# Allegro board BBear_balance_carv2_0.brd
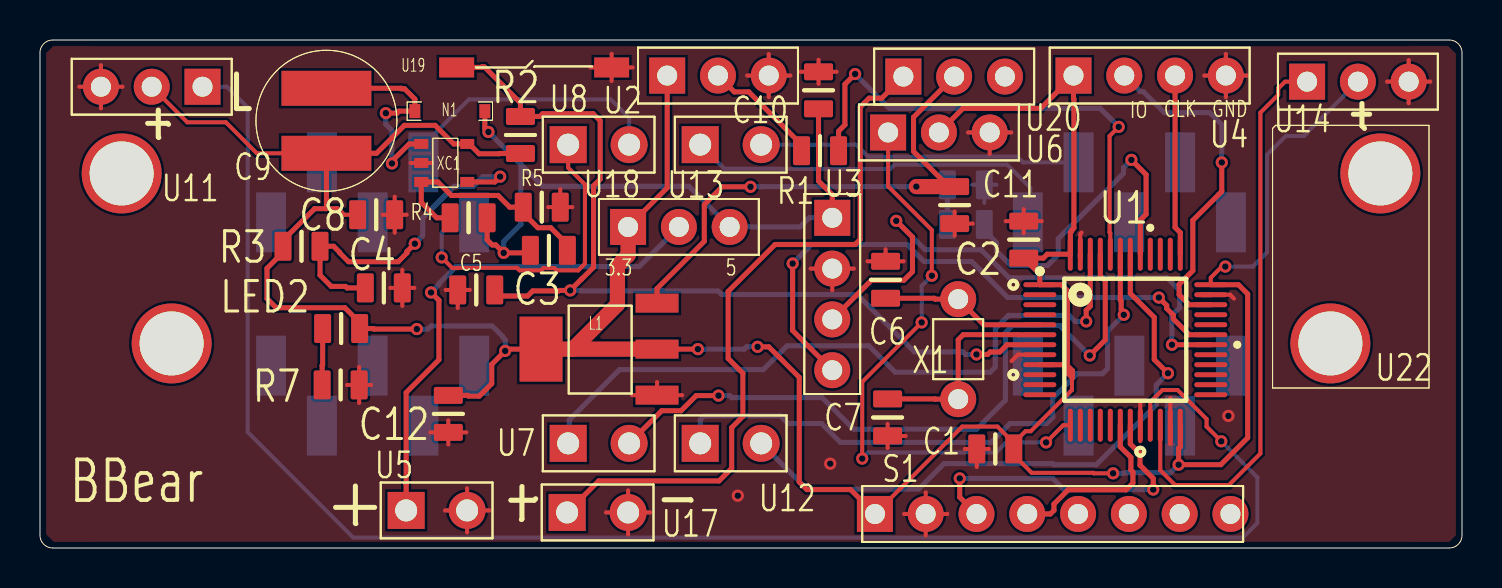
[diagram p0: board, top side]
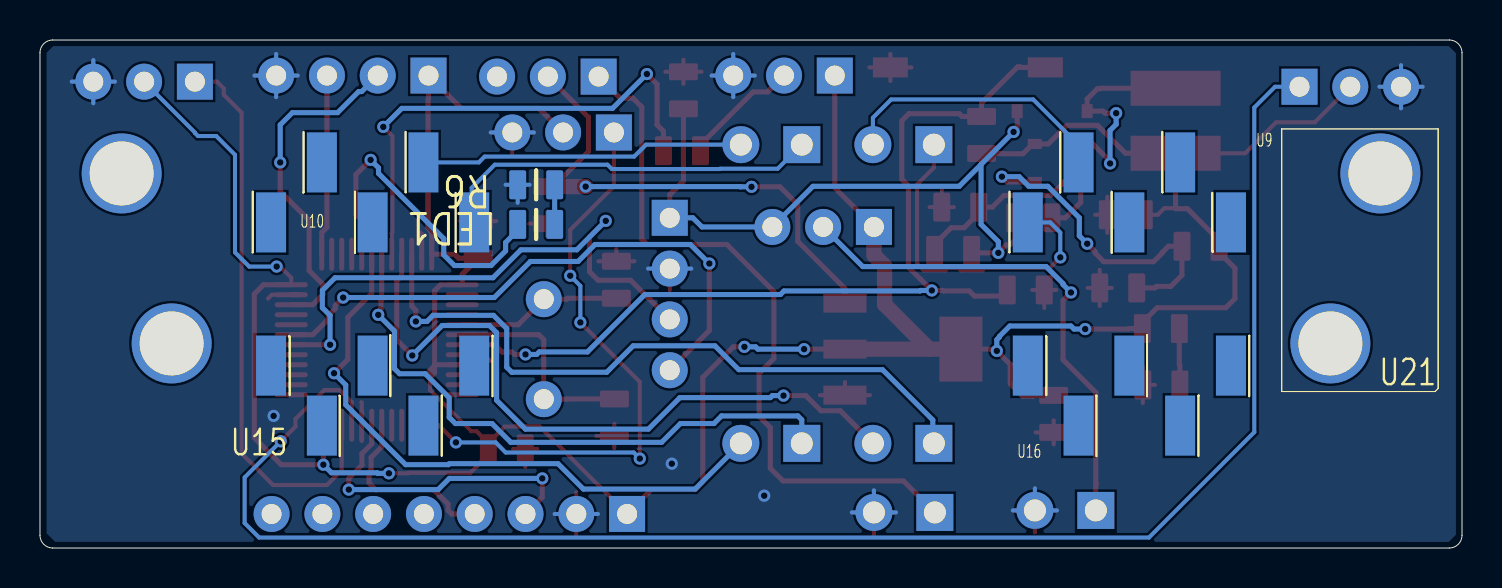
[diagram p1: board, bottom side, seen from below]

Outline 71.12 x 25.4 mm; copper layers: TOP, BOTTOM. Coordinates in mm from the lower left corner of the outline.
Outline path: 0,24.77 arc(0.19,25.21) 0.64,25.4 70.48,25.4 arc(70.93,25.21) 71.12,24.77 71.12,0.63 arc(70.93,0.19) 70.48,0 0.64,0 arc(0.19,0.19) 0,0.63 0,24.77

## Placement (name value [footprint] x y rotation side)
C1  0.1UF  [C-0805]  47.78 4.95 0 top
C2  0.1UF  [C-0805]  49.2 15.42 270 top
C3  CFB1000pF  [C-0805]  25.45 14.88 0 top
C4  CSS0.1uF  [C-0805]  17.2 13 0 top
C5  1UF  [C-0805]  21.82 12.9 0 top
C6  22PF  [C-0805]  42.29 13.41 270 top
C7  22PF  [C-0805]  42.39 6.53 90 top
C8  CIN4.7uF  [C-0805]  16.81 16.66 0 top
C9  L_4.7uH  [CD43]  14.33 21.36 180 top
C10  CL4.7uF  [C-0805]  38.94 22.89 90 top
C11  0.1UF  [C-0805]  45.75 17.14 270 top
C12  10UF  [C-0805]  20.42 6.71 90 top
L1  LM1117  [LM1117_3_3]  30.86 12.24 180 top
LED1  HEARTLED  [C-0805]  46.3 16.18 0 bottom
LED2  POWER  [C-0805]  15.06 10.97 0 top
N1  SD_XBS104S14R  [SOD-123]  20.5 21.84 0 top
R1  10K  [C-0805]  39.01 19.86 0 top
R2  10K  [C-0805]  24.03 20.65 90 top
R3  RSS220K  [C-0805]  13.08 15.09 0 top
R4  RFB1_300K  [C-0805]  21.44 16.51 0 top
R5  RFB2_75K  [C-0805]  25.1 17.04 180 top
R6  1K  [C-0805]  46.3 18.16 0 bottom
R7  1K  [C-0805]  15.04 8.15 0 top
S1  MPU6050  [CON8]  41.76 1.7 90 top
U1  STM32F103C8T6  [NCU100_LQFP_48]  54.28 10.41 0 top
U2  BOOT0  [CON3]  31.37 23.62 90 top
U3  -  [CON4]  39.62 16.51 0 top
U4  SWD  [CON4]  51.69 23.62 90 top
U5  CON2  [CON2_R2_54]  18.31 1.88 90 top
U6  KEY  [CON3]  42.42 20.78 90 top
U7  CON2  [CON2_R2_54]  26.42 5.23 90 top
U8  MOTOR-A  [CON2_R2_54]  26.42 20.17 90 top
U9  CON5  [TP2_54_5]  16.64 17.78 270 bottom
U10  CON5  [TP2_54_5]  54.48 17.78 270 bottom
U11  KEY  [CON3]  8.13 23.06 270 top
U12  CON2  [CON2_R2_54]  33.02 5.23 90 top
U13  MOTOR-B  [CON2_R2_54]  33.02 20.17 90 top
U14  KEY  [CON3]  63.37 23.32 90 top
U15  CON5  [TP2_54_5]  54.48 7.62 90 bottom
U16  CON5  [TP2_54_5]  16.64 7.62 90 bottom
U17  CON2  [CON2_R2_54]  26.37 1.78 90 top
U18  switch  [CON3]  29.41 16.05 90 top
U19  CON2  [3_6KEY]  24.71 24.03 0 top
U20  KEY  [CON3]  43.18 23.57 90 top
U21  CON2  [P4_003_20]  5.33 14.48 0 bottom
U22  CON2  [P4_003_20]  65.79 14.48 0 top
X1  -  [XTAL]  45.92 7.44 90 top
XC1  -  [XC9119]  20.22 19.25 270 top

## Library data of the parts
C1 C2 C5-C7 C11 C12 = CAP: Tolerance: RichardLC; User Part Number: pn
C3 C4 C8 C10 = CAP NP: Tolerance: RichardLC; User Part Number: pn
C9 = CDRH104R_330uH
L1 = LM1117
LED1 LED2 = LED: Tolerance: RichardLC; User Part Number: pn
N1 = 1N5819
R1-R7 = R: Tolerance: RichardLC; User Part Number: pn
S1 = CON8
U1 = STM32F103C8T6: User Part Number: pn; Tolerance: RichardLC
U2 U6 U11 U14 U18 U20 = CON3
U3 U4 = CON4
U5 U7 U8 U12 U13 U17 U19 U21 U22 = CON2
U9 U10 U15 U16 = CON5
X1 = XTAL
XC1 = XC9119

## Footprints (pads in the part's own frame, mm; a bottom-side part is the same pattern mirrored in y, then rotated)
3_6KEY
  rect 1.75x1 smd: 1(-3.875,0) 2(3.875,0)
C-0805
  custom 0.848x1.448 smd: 1(-0.925,0) 2(0.925,0)
CD43
  rect 4.5x1.75 smd: 1(0,1.625) 2(0,-1.625)
CON2_R2_54
  rect 1.849x1.849 hole 1.1: 1(0,0)
  round 1.849 hole 1.1: 2(0,-3.048)
CON3
  rect 1.8x1.8 hole 1: 1(0,0)
  round 1.8 hole 1: 2(0,-2.54) 3(0,-5.08)
CON4
  rect 1.8x1.8 hole 1: 1(0,0)
  round 1.8 hole 1: 2(0,-2.54) 3(0,-5.08) 4(0,-7.62)
CON8
  rect 1.8x1.8 hole 1: 1(0,0)
  round 1.8 hole 1: 2(0,-2.54) 3(0,-5.08) 4(0,-7.62) 5(0,-10.16) 6(0,-12.7) 7(0,-15.24) 8(0,-17.78)
LM1117_3_3
  rect 2.15x0.95 smd: 1(0,0) 2(0,2.3) 3(0,4.6)
  rect 2.15x3.25 smd: 4(5.8,2.3)
NCU100_LQFP_48
  oval 1.651x0.249 smd: 1(-4.275,2.75) 2(-4.275,2.25) 3(-4.275,1.75) 4(-4.275,1.25) 5(-4.275,0.75) 6(-4.275,0.25) 7(-4.275,-0.25) 8(-4.275,-0.75) 9(-4.275,-1.25) 10(-4.275,-1.75) 11(-4.275,-2.25) 12(-4.275,-2.75) 25(4.275,-2.75) 26(4.275,-2.25) 27(4.275,-1.75) 28(4.275,-1.25) 29(4.275,-0.75) 30(4.275,-0.25) 31(4.275,0.25) 32(4.275,0.75) 33(4.275,1.25) 34(4.275,1.75) 35(4.275,2.25) 36(4.275,2.75)
  oval 0.249x1.651 smd: 13(-2.75,-4.275) 14(-2.25,-4.275) 15(-1.75,-4.275) 16(-1.25,-4.275) 17(-0.75,-4.275) 18(-0.25,-4.275) 19(0.25,-4.275) 20(0.75,-4.275) 21(1.25,-4.275) 22(1.75,-4.275) 23(2.25,-4.275) 24(2.75,-4.275) 37(2.75,4.275) 38(2.25,4.275) 39(1.75,4.275) 40(1.25,4.275) 41(0.75,4.275) 42(0.25,4.275) 43(-0.25,4.275) 44(-0.75,4.275) 45(-1.25,4.275) 46(-1.75,4.275) 47(-2.25,4.275) 48(-2.75,4.275)
P4_003_20
  round 4 hole 3.2: 1(-1.25,-4.25) 2(1.25,4.25)
SOD-123
  rect 0.55x0.7 smd: 1(-1.75,0) 2(1.75,0)
TP2_54_5
  rect 3x1.5 smd: 1(1.5,5.08) 2(1.5,0) 3(1.5,-5.08) 4(-1.5,2.54) 5(-1.5,-2.54)
XC9119
  rect 0.5x0.7 smd: 1(-0.95,-1.15) 2(0,-1.15) 3(0.95,-1.15) 4(0.95,1.15) 5(-0.95,1.15)
XTAL
  round 1.8 hole 1: 1(0,0) 2(5,0)

## Nets
GND: C1.1 C2.1 C4.2 C5.1 C6.1 C7.1 C8.2 C10.2 C11.2 C12.1 L1.3(GND) R5.1 R6.2 R7.2 S1.2 U1.8(VSSA) U1.20(PB2/BOOT1) U1.23(VSS_1) U1.35(VSS_2) U1.47(VSS_3) U2.3 U3.2 U4.4 U5.2 U6.3 U11.3 U14.3 U17.2 U19.2 XC1.2(VSS)
VCC3.3: C1.2 C2.2 C8.1 C9.1 C12.2 L1.2(OUT2) L1.4(OUT1) LED2.2 R2.1 R3.1 S1.1 U1.1(VBAT) U1.9(VDDA) U1.24(VDD_1) U1.36(VDD_2) U1.48(VDD_3) U2.1 U4.1 U6.2 U11.2 U14.2 U18.1 XC1.5(VDD)
BAT+: U17.1 U20.1
BAT_5V: C3.1 C10.1 N1.2 R4.2 U3.1 U18.3
BOOT0: R1.2 U1.44(BOOT0)
HEART_LED: LED1.2 U1.41(PB5)
LEFT_BACK: U1.43(PB7) U12.1
LEFT_FOR: U1.42(PB6) U12.2
MOTOR_BAT: U5.1 U18.2
MOTORA+: U8.1 U9.3
MOTORA-: U8.2 U9.5
MOTORB+: U10.1 U13.1
MOTORB-: U10.4 U13.2
OSCIN: C6.2 U1.5(OSCIN) X1.2
OSCOUT: C7.2 U1.6(OSCOUT) X1.1
PA3: U1.13(PA3) U6.1
PA9: U1.31(PA10) U3.4
PA10: U1.30(PA9) U3.3
PB10: U1.21(PB10) U11.1
PB11: U1.22(PB11) U14.1
RESET: C5.2 R2.2 U1.7(NRST) U19.1
RIGHT_BACK: U1.46(PB9) U7.1
RIGHT_FOR: U1.45(PB8) U7.2
SCL: S1.3 U1.19(PB1)
SDA: S1.4 U1.18(PB0)
SWCLK: U1.37(SWCLK) U4.3
SWIO: U1.34(SWIO) U4.2
N00802: C11.1 L1.1(VCC-IN) U20.2
N03806: LED2.1 R7.1
N07785: LED1.1 R6.1
N28892: C4.1 R3.2 XC1.4(CE/SS)
N28953: C9.2 N1.1 XC1.1(LX)
N29036: C3.2 R4.1 R5.2 XC1.3(FB)
N073361: R1.1 U2.2

Pads without a net: S1 5 6 7 8; U1 2 3 4 10 11 12 14 15 16 17 25 26 27 28 29 32 33 38 39 40; U9 1 2 4; U10 2 3 5; U15 1 2 3 4 5; U16 1 2 3 4 5; U20 3; U21 1 2; U22 1 2

## Via types
v1: diameter 0.61, hole 0.33, TOP to BOTTOM, 42 vias

## Routing (per net, layer and track width the routed paths; a pad name or vN(x,y) marks a point on that pad's centre or on a via; arc(x,y) is an arc through that point)
GND: length 117
  TOP w0.203: U11.3 3.05,24.14 ; U11.3 4.13,23.06 ; U11.3 1.97,23.06 ; U11.3 3.05,21.98 ; C7.1 43.29,5.6 ; C7.1 42.39,6.21 ; C7.1 42.39,5 ; U3.2 40.7,13.97 ; U3.2 38.55,13.97 ; U3.2 39.62,12.89 ; 55.04,7.29 55.03,7.28 U1.20 55.03,5.35 ; 59.31,23.62 60.39,23.62 ; 59.31,23.62 59.31,24.7 ; 59.31,23.62 59.31,22.54 ; 59.31,23.62 58.23,23.62 ; 38.94,23.21 C10.2 ; C10.2 39.84,23.81 ; C10.2 38.04,23.81 ; C10.2 38.94,24.41 ; C1.1 47.45,4.95 ; C1.1 46.25,4.95 ; C1.1 46.85,4.05 ; 20.29,12.9 C5.1 ; C5.1 20.89,12 ; C5.1 21.5,12.9 ; 19.52,5.78 C12.1 ; C12.1 20.42,5.18 ; C12.1 21.32,5.78 ; C12.1 20.42,6.38 ; U1.35 59.52,12.66 59.72,12.47 ; 46.42,20.78 U6.3 ; U6.3 47.5,19.7 ; U6.3 48.58,20.78 ; L1.3 30.86,8.3 ; L1.3 32.11,7.64 ; L1.3 29.61,7.64 ; 68.45,22.24 U14.3 ; U14.3 69.53,23.32 ; U14.3 67.37,23.32 ; U14.3 68.45,24.4 ; C2.1 50.1,16.34 ; C2.1 48.3,16.34 ; C2.1 49.2,16.95 ; C2.1 49.2,15.74 ; U5.2 22.46,1.88 ; U5.2 21.36,2.98 ; U5.2 20.26,1.88 ; U5.2 21.36,0.78 ; C8.2 17.74,17.56 ; C8.2 17.74,15.76 ; C8.2 18.34,16.66 ; C8.2 17.14,16.66 ; 29.41,0.68 U17.2 ; U17.2 28.31,1.78 ; U17.2 29.41,2.88 ; U17.2 30.52,1.78 ; 41.39,14.34 C6.1 ; C6.1 42.29,14.94 ; C6.1 43.19,14.34 ; 15.36,8.15 R7.2 ; R7.2 15.96,7.25 ; R7.2 15.96,9.06 ; R7.2 16.56,8.15 ; 56.54,7.49 56.53,7.48 U1.23 ; 43.22,1.7 S1.2 ; S1.2 44.3,2.78 ; S1.2 44.3,0.62 ; S1.2 45.38,1.7 ; R5.1 26.62,17.04 ; R5.1 26.02,17.95 ; R5.1 25.42,17.04 ; U1.8 48.91,9.66 48.59,9.35 ; 19.6,19.25 XC1.2 18.54,19.25 ; U19.2 29.64,24.03 ; U19.2 28.59,23.35 ; U19.2 27.54,24.03 ; U19.2 28.59,24.71 ; 36.45,23.62 36.45,24.7 ; 36.45,23.62 35.37,23.62 ; 36.45,23.62 37.53,23.62 ; 36.45,23.62 36.45,22.54 ; 52.1,15.77 52.03,15.71 U1.47 ; 45.75,15.62 C11.2 ; C11.2 45.75,16.82 ; C11.2 46.65,16.22 ; 18.12,12.1 C4.2 ; C4.2 18.12,13.91 ; C4.2 18.72,13 ; C4.2 17.52,13
  TOP w0.254: 56.53,5.22 U1.23 ; 58.1,12.66 U1.35 ; C7.1 42.09,5.6 ; 52.03,14.54 U1.47
  BOTTOM w0.203: U11.3 3.05,24.14 ; U11.3 3.05,21.98 ; U11.3 1.97,23.06 ; U11.3 4.13,23.06 ; 58.23,23.62 59.31,23.62 ; 59.31,23.62 59.31,22.54 ; 59.31,23.62 59.31,24.7 ; 59.31,23.62 60.39,23.62 ; 38.55,13.97 U3.2 40.7,13.97 ; U5.2 21.36,2.98 ; U5.2 22.46,1.88 ; U5.2 20.26,1.88 ; R6.2 47.83,18.16 ; R6.2 46.63,18.16 ; R6.2 47.23,17.26 ; 48.58,20.78 U6.3 46.42,20.78 ; 68.45,22.24 U14.3 ; U14.3 68.45,24.4 ; U14.3 69.53,23.32 ; U14.3 67.37,23.32 ; 35.37,23.62 36.45,23.62 ; 36.45,23.62 37.53,23.62 ; 36.45,23.62 36.45,22.54 ; 36.45,23.62 36.45,24.7 ; 45.38,1.7 S1.2 43.22,1.7 ; U17.2 29.41,2.88 ; U17.2 30.52,1.78 ; U17.2 28.31,1.78
  vias: v1(34.9,2.62) v1(39.52,4.22) v1(59.44,6.6)
VCC3.3: length 172.5
  TOP w0.203: 48.7,5.25 49.29,5.84 49.55,5.84 51.61,7.9 51.61,8.48 51.64,8.51 ; 48.7,5.25 C1.2 48.7,4.65 49.6,3.76 52.68,3.76 52.7,3.73 v1(53.67,3.73) ; 48.7,5.25 47.88,6.07 46.13,6.07 S1.1 ; C8.1 15.21,16.66 14.88,16.99 14.35,16.99 14.33,16.97 ; C9.1 10.85,19.74 9.3,21.29 7.37,21.29 U11.2 ; U1.36 58.55,13.52 59.11,14.07 v1(59.28,14.07)
  TOP w0.254: C12.2 21.4,7.63 21.44,7.59 21.97,7.59 22.59,8.22 22.59,9.18 v1(23.27,9.86) 23.35,9.94 L1.4 ; S1.1 40.54,2.92 38.35,2.92 37.97,3.3 37.97,8.53 36.45,10.06 v1(35.89,10.06) ; U1.9 51.34,9.16 51.64,8.86 51.64,8.51 51.38,8.76 51.38,12.86 51.08,13.16 U1.1 50,13.69 C2.2 50.18,14.49 50.37,14.69 U1.48 51.53,15.77 51.6,15.84 51.6,15.89 51.71,16 51.71,22.45 51.69,22.47 U4.1 ; L1.2 v1(32.9,9.94) ; U18.1 31.37,18.01 U2.1 ; U1.36 59.94,13.16 60.4,12.7 60.4,5.51 59.06,4.17 v1(56.95,4.17) 56.95,4.98 57.03,5.06 U1.24 ; v1(18.85,10.95) 16.69,10.95 16.67,10.97 LED2.2 15.99,11.27 15.25,12.01 11.81,12.01 11.35,12.47 11.35,13.99 12.16,14.79 R3.1 12.16,15.39 13.74,16.97 14.33,16.97 C9.1 16.83,19.74 18.23,21.13 19.76,21.13 20.69,20.2 XC1.5 21.47,20.2 21.96,19.71 22.96,19.71 22.98,19.73 R2.1 ; 51.69,23.77 U4.1 ; U4.1 50.05,21.98 46.16,21.98 U6.2
  TOP w0.762: U18.1 29.41,14.64 28.88,14.11 28.88,12.18 26.64,9.94 ; 26.64,9.94 L1.2 ; 26.64,9.94 L1.4
  BOTTOM w0.203: v1(59.28,14.07) 60.66,14.07 61.37,14.78 61.37,19.66 62.31,20.6 63.22,20.6 63.37,20.75 63.37,20.78 U14.2
  BOTTOM w0.254: v1(32.9,9.94) 35.22,9.94 35.33,10.06 v1(35.89,10.06) ; v1(23.27,9.86) 23.27,10.41 23.14,10.54 23.14,10.58 22.62,11.1 19.56,11.1 19.41,10.95 v1(18.85,10.95) ; v1(56.95,4.17) 56.54,3.76 54.25,3.76 54.23,3.73 v1(53.67,3.73)
BAT+: length 35.6
  TOP w0.254: U17.1 27.94,3.35 33.96,3.35 34.59,3.99 34.59,6.02 35.15,6.58 35.15,8.74 34.42,9.47 34.42,12.83 36.76,15.17 40.77,15.17 41.02,15.43 41.02,22.05 41.46,22.49 42.1,22.49 U20.1
BAT_5V: length 34.6
  TOP w0.254: C3.1 24.4,14.76 v1(23.19,14.76) 22.79,15.15 22.62,15.15 22.36,15.41 R4.2 ; N1.2 22.25,20.98 v1(22.43,20.8) ; C10.1 38.94,18.35 39.62,17.66 U3.1
  BOTTOM w0.254: v1(22.43,20.8) 24.05,19.18 ; 24.05,19.18 25.15,18.08 32.46,18.08 U18.3 38.01,16.05 38.47,16.51 U3.1 ; 24.05,19.18 24.05,16.18 23.19,15.32 v1(23.19,14.76)
BOOT0: length 25
  TOP w0.203: v1(53.95,21.06) 53.49,20.6 53.49,15.78 53.53,15.74 U1.44
  TOP w0.254: v1(40.77,23.7) 40.26,23.19 40.26,21.16 39.94,20.84 R1.2
  BOTTOM w0.254: v1(40.77,23.7) 42.48,21.98 53.02,21.98 v1(53.95,21.06)
HEART_LED: length 16.6
  TOP w0.254: v1(54.58,19.41) 55.32,18.67 55.32,16.69 55.03,16.4 U1.41
  BOTTOM w0.254: LED1.2 47.23,15.88 47.83,15.28 47.83,14.85 48.56,14.12 50.39,14.12 50.93,14.66 50.93,15.47 54.19,18.73 54.19,19.01 v1(54.58,19.41)
LEFT_BACK: length 30.4
  TOP w0.254: U1.43 54.03,12.39 54.07,12.35 54.07,11.93 54.2,11.8 v1(54.2,11.66)
  BOTTOM w0.254: v1(54.2,11.66) 53.39,10.85 53.39,8.97 53.14,8.71 51.85,8.71 50.65,7.51 50.65,6.53 50.34,6.22 48.51,6.22 47.57,5.28 40.03,5.28 39.09,6.22 37.41,6.22 37.03,6.6 33.21,6.6 33.02,6.41 U12.1
LEFT_FOR: length 31
  TOP w0.254: v1(56.41,8.74) 55.73,9.42 55.73,11.53 54.53,12.73 U1.42
  BOTTOM w0.254: U12.2 38.35,2.95 43.94,2.95 45.21,4.22 50.65,4.22 50.7,4.17 52.83,4.17 55.83,7.16 55.83,8.15 v1(56.41,8.74)
MOTOR_BAT: length 25.5
  TOP w0.254: U5.1 18.31,3.2 18.29,3.23 18.31,3.25 18.31,7.77 19.95,9.41 19.95,12.38 v1(19.56,12.78)
  BOTTOM w0.254: U18.2 29.97,14.07 20.8,14.07 19.95,13.22 19.95,13.17 v1(19.56,12.78)
MOTORA+: length 17.1
  TOP w0.203: v1(20.09,14.53) 20.62,14 20.9,14 20.91,14.01 23.84,14.01 23.86,14 23.87,14 23.99,13.88 25.07,13.88 25.18,14 25.72,14 25.84,13.88 26.92,13.88 27.25,14.22 27.25,18.18 26.42,19.01 U8.1
  BOTTOM w0.203: v1(20.09,14.53) 20.09,15.77 20.6,16.28 21.72,16.28
MOTORA-: length 14.1
  BOTTOM w0.203: U9.5 19.05,19.41 ; 19.05,19.41 19.05,19.28 ; 19.05,19.41 19.05,20.03 21.45,22.43 28.55,22.43 29.46,21.51 U8.2
MOTORB+: length 19.4
  BOTTOM w0.203: 49.4,16.28 49.53,16.41 49.53,18.01 48.37,19.16 42.74,19.16 42.52,18.95 37.11,18.95 37.09,18.96 34.22,18.96 U13.1
MOTORB-: length 16.5
  BOTTOM w0.203: 52.2,19.28 U10.4 49.17,19.28 48.88,19.57 41.4,19.57 40.81,20.17 U13.2
OSCIN: length 8.3
  TOP w0.254: U1.5 47.2,11.16 X1.2 44.77,12.44 44.73,12.49 C6.2
OSCOUT: length 10.7
  TOP w0.254: U1.6 48.93,10.66 48.92,10.67 46.18,10.67 45.92,10.41 X1.1 44.77,7.44 44.76,7.45 C7.2
PA3: length 29.8
  TOP w0.203: v1(41.12,4.47) 41.12,8.31 v1(44.09,11.28) ; v1(44.6,13.61) 44.6,15.9 42.42,18.08 U6.1 ; v1(50.32,5.28) 51.18,6.14 U1.13
  BOTTOM w0.203: v1(41.12,4.47) 41.43,4.78 47.83,4.78 48.33,5.28 v1(50.32,5.28) ; v1(44.09,11.28) 44.09,13.11 v1(44.6,13.61)
PA9: length 29.5
  TOP w0.254: v1(37.64,14.22) 37.64,10.87 U3.4 ; U1.31 57.48,10.66 56.68,11.46 56.68,11.64 56.35,11.97 56.35,12.13 v1(55.96,12.52)
  BOTTOM w0.254: v1(37.64,14.22) 38.59,15.17 43.36,15.17 44.21,14.33 46.6,14.33 48.4,12.52 v1(55.96,12.52)
PA10: length 28.3
  TOP w0.254: U1.30 v1(56.61,10.16) ; U3.3 41.58,13.39 43.21,13.39 43.64,13.82 43.64,15.54 v1(42.82,16.36)
  BOTTOM w0.254: v1(56.61,10.16) 56.61,11.63 57,12.01 57,12.88 56.36,13.51 48.46,13.51 47.07,14.91 44.27,14.91 v1(42.82,16.36)
PB10: length 83
  TOP w0.203: v1(59.08,5.33) 58.34,6.07 58.34,6.45 56.9,7.9 56.13,7.9 55.53,7.3 U1.21
  BOTTOM w0.203: v1(59.08,5.33) 60.88,3.53 60.88,1.24 60.16,0.52 15.66,0.52 10.39,5.79 10.39,22.02 9.35,23.06 U11.1
PB11: length 28.4
  TOP w0.203: U14.1 62.27,23.32 61.93,22.97 61.93,22.66 61.04,21.77 61.04,4.72 59.46,3.15 56.77,3.15 56.03,3.89 U1.22
RESET: length 47
  TOP w0.254: U19.1 22.07,24.03 22.1,24.05 22.23,24.05 24.03,22.25 R2.2 25.01,21.58 25.15,21.72 27.66,21.72 28.02,21.36 28.02,18.44 27.69,18.11 27.69,14.04 27.09,13.45 27.09,13.45 v1(26.52,12.88) 25.96,12.88 25.93,12.85 24.64,12.85 24.39,12.6 23.05,12.6 C5.2 ; v1(46.84,9.68) 47.4,9.68 47.52,9.8 48,9.8 48.37,10.16 U1.7
  BOTTOM w0.254: v1(46.84,9.68) 46.28,9.68 46.15,9.8 43.74,9.8 40.87,12.67 34.09,12.67 33.91,12.85 27.1,12.85 27.08,12.88 v1(26.52,12.88)
RIGHT_BACK: length 35
  TOP w0.254: v1(52.32,11.33) 52.32,11.89 52.53,12.09 52.53,13.61 52.53,13.61 U1.46
  BOTTOM w0.254: v1(52.32,11.33) 51.77,11.33 51.46,11.63 48.44,11.63 47.78,10.97 47.78,9.04 47.52,8.79 42.77,8.79 41.45,10.11 37.36,10.11 36.17,8.92 28.98,8.92 26.47,6.4 26.47,5.28 U7.1
RIGHT_FOR: length 35
  TOP w0.254: U7.2 31.09,6.86 32.06,6.86 32.82,7.62 v1(33.93,7.62) ; U1.45 53.03,13.61 53.28,13.36 53.28,10.4 v1(52.5,9.63)
  BOTTOM w0.254: v1(52.5,9.63) 51,11.13 48.64,11.13 48.29,10.77 48.29,7.39 46.84,5.94 40.69,5.94 39.12,7.52 34.59,7.52 34.49,7.62 v1(33.93,7.62)
SCL: length 15.7
  TOP w0.254: S1.3 46,2.54 v1(46,3.48) ; v1(55.68,2.92) 55.68,3.48 55.02,4.14 55.02,4.72 54.53,5.21 U1.19
  BOTTOM w0.254: v1(46,3.48) 50.65,3.48 51.21,2.92 v1(55.68,2.92)
SDA: length 9.3
  TOP w0.254: S1.4 50.53,1.7 50.71,1.88 50.71,2.2 51.42,2.91 54.32,2.91 54.66,3.25 54.66,3.8 54.56,3.9 54.56,4.53 54.03,5.06 U1.18
SWCLK: length 9.2
  TOP w0.254: U1.37 57.03,15.77 56.77,16.03 56.77,23.77
SWIO: length 17.1
  TOP w0.254: U1.34 57.48,12.16 56.97,12.67 56.97,13.18 57.66,13.87 57.66,16.38 59.11,17.83 v1(59.11,19.28)
  BOTTOM w0.254: v1(59.11,19.28) 59.11,21.16 58.5,21.77 56.24,21.77 55.18,22.82 55.03,22.82 U4.2
N00802: length 25.9
  TOP w0.254: U20.2 43.69,21.54 43.69,19.83 45.45,18.07 ; v1(35.53,18.06) 34.11,18.06 33.22,17.17 33.22,15.33 30.86,12.97 L1.1
  TOP w0.762: C11.1 v1(43.83,18.07)
  BOTTOM w0.254: v1(43.83,18.07) 36.1,18.07 36.09,18.06 v1(35.53,18.06)
N03806: length 2.8
  TOP w0.254: R7.1 14.11,9.13 14.14,9.16 LED2.1
N07785: length 2
  BOTTOM w0.254: LED1.1 R6.1
N28892: length 17.4
  TOP w0.254: v1(18.75,15.21) 18.35,14.82 18.35,14.75 17.92,14.31 15.43,14.31 14.99,14.76 14.99,14.79 14.68,15.09 R3.2 14.01,13.64 14.56,13.08 15.28,13.08 15.36,13 C4.1 ; XC1.4 22.75,18.3 v1(23.01,18.57)
  BOTTOM w0.254: v1(18.75,15.21) 19.14,15.61 19.14,16.51 20.71,18.08 21.67,18.08 22.15,18.57 v1(23.01,18.57)
N28953: length 11.3
  TOP w0.254: v1(17.6,19.23) 17.6,19.34 18.46,20.2 XC1.1 ; C9.2 18.06,22.99 18.08,22.96 18.23,22.96 18.75,22.45 N1.1 17.96,21.84 17.86,21.74 v1(17.3,21.74)
  BOTTOM w0.254: v1(17.6,19.23) 17.6,20.88 17.3,21.18 v1(17.3,21.74)
N29036: length 11.9
  TOP w0.254: C3.2 26.38,15.18 25.55,16.01 24.9,16.01 24.17,16.74 R5.2 23.49,17.04 22.91,17.63 20.57,17.63 19.9,18.3 XC1.3 19.07,17.28 19.84,16.51 R4.1
N073361: length 5.9
  TOP w0.254: 33.91,23.62 34.73,22.81 35.45,22.81 38.09,20.16 R1.1

## Copper pours and planes (outline as drawn; the poured copper is in the pictures)
GND on TOP: 68.45,25.09 68.45,25.1 70.43,25.1 70.82,24.71 70.82,0.63 70.48,0.3 68.45,0.3 2.69,0.31 2.69,0.3 0.69,0.3 0.3,0.69 0.3,24.74 0.66,25.1 2.67,25.1 ; 7 cut-outs
GND on BOTTOM: 70.46,25.09 70.79,24.77 70.79,0.74 70.36,0.31 2.72,0.31 2.72,0.3 0.66,0.3 0.3,0.66 0.3,24.74 0.66,25.1 2.67,25.1 ; 5 cut-outs

## Text on the board
Ref Des/Silkscreen Top: 3.3 | 5 | IO | CLK | GND | BBear
COMPVAL_TYPE_TOP: FIGURE | SIZE | 13.0 | 39.37 | 43.3 | 125.98 | DRILL CHART: TOP to BOTTOM | ALL UNITS ARE IN MILS | PLATED | QTY | 42 | 36 | 12 | 4
